# EAGLE board h_bridge_v2.1 (EAGLE 7.1.0)
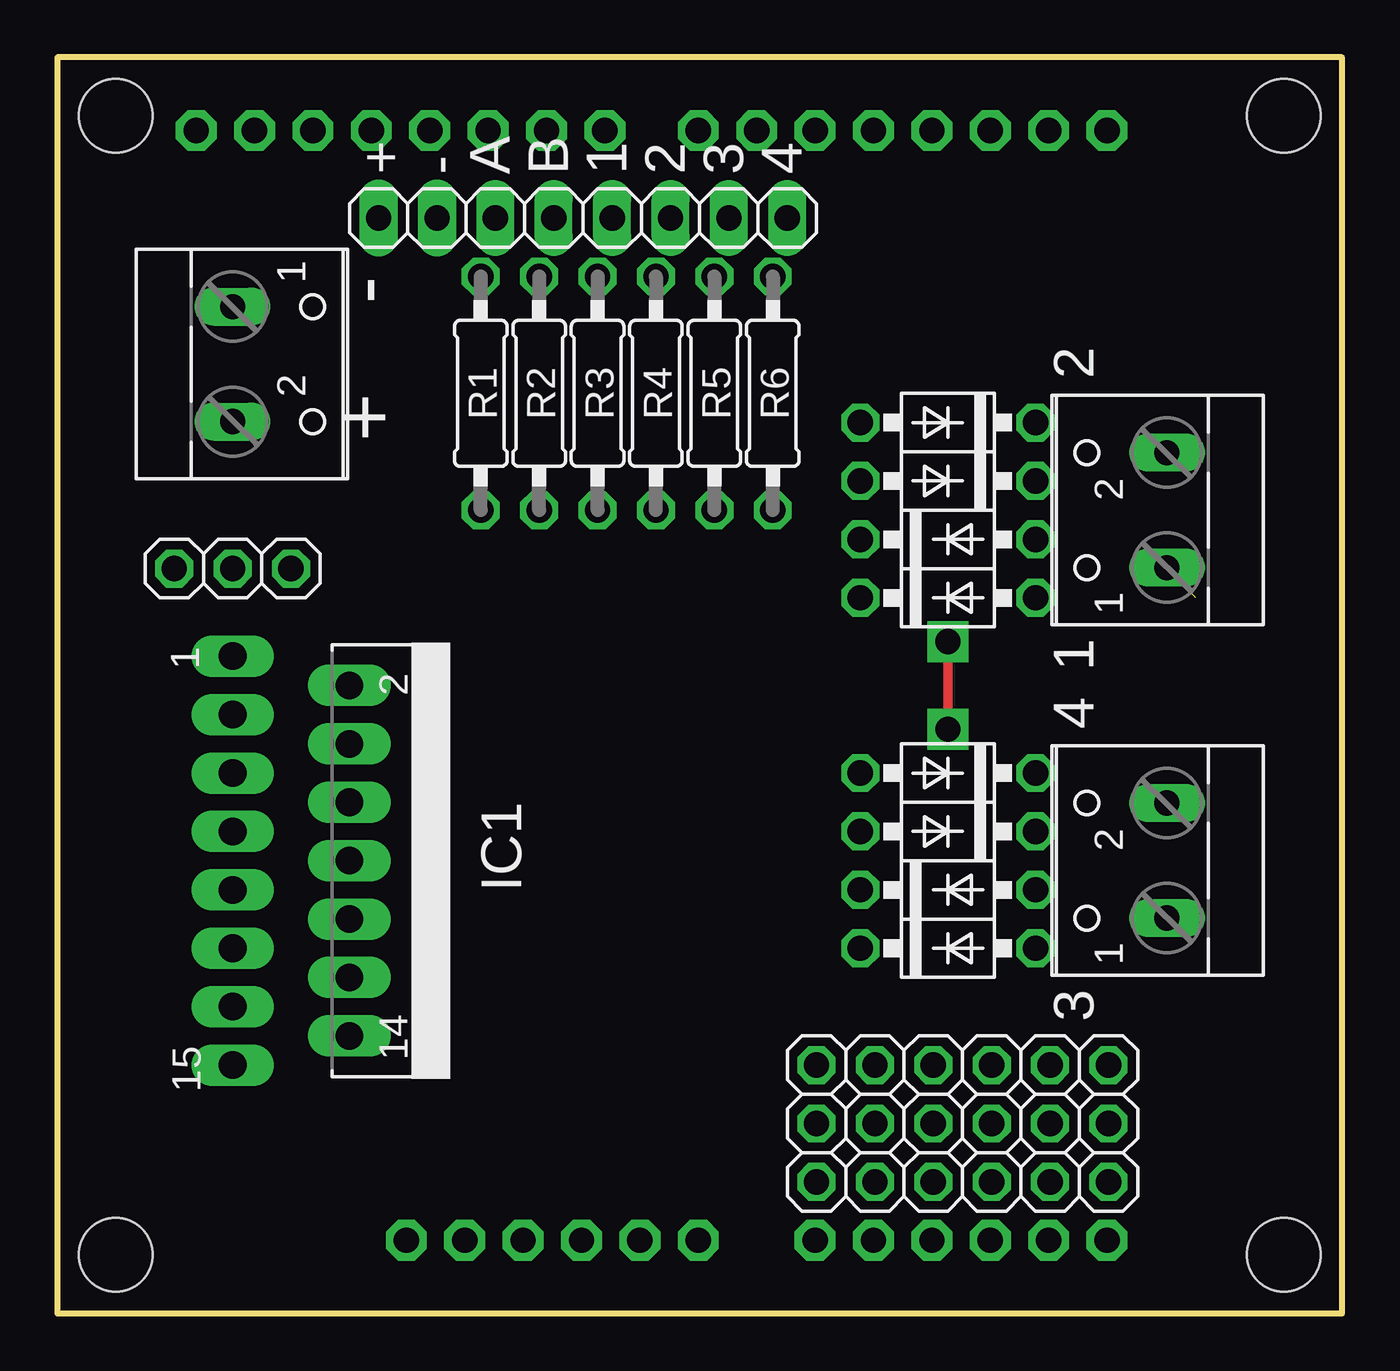
[diagram p0: board, top side]
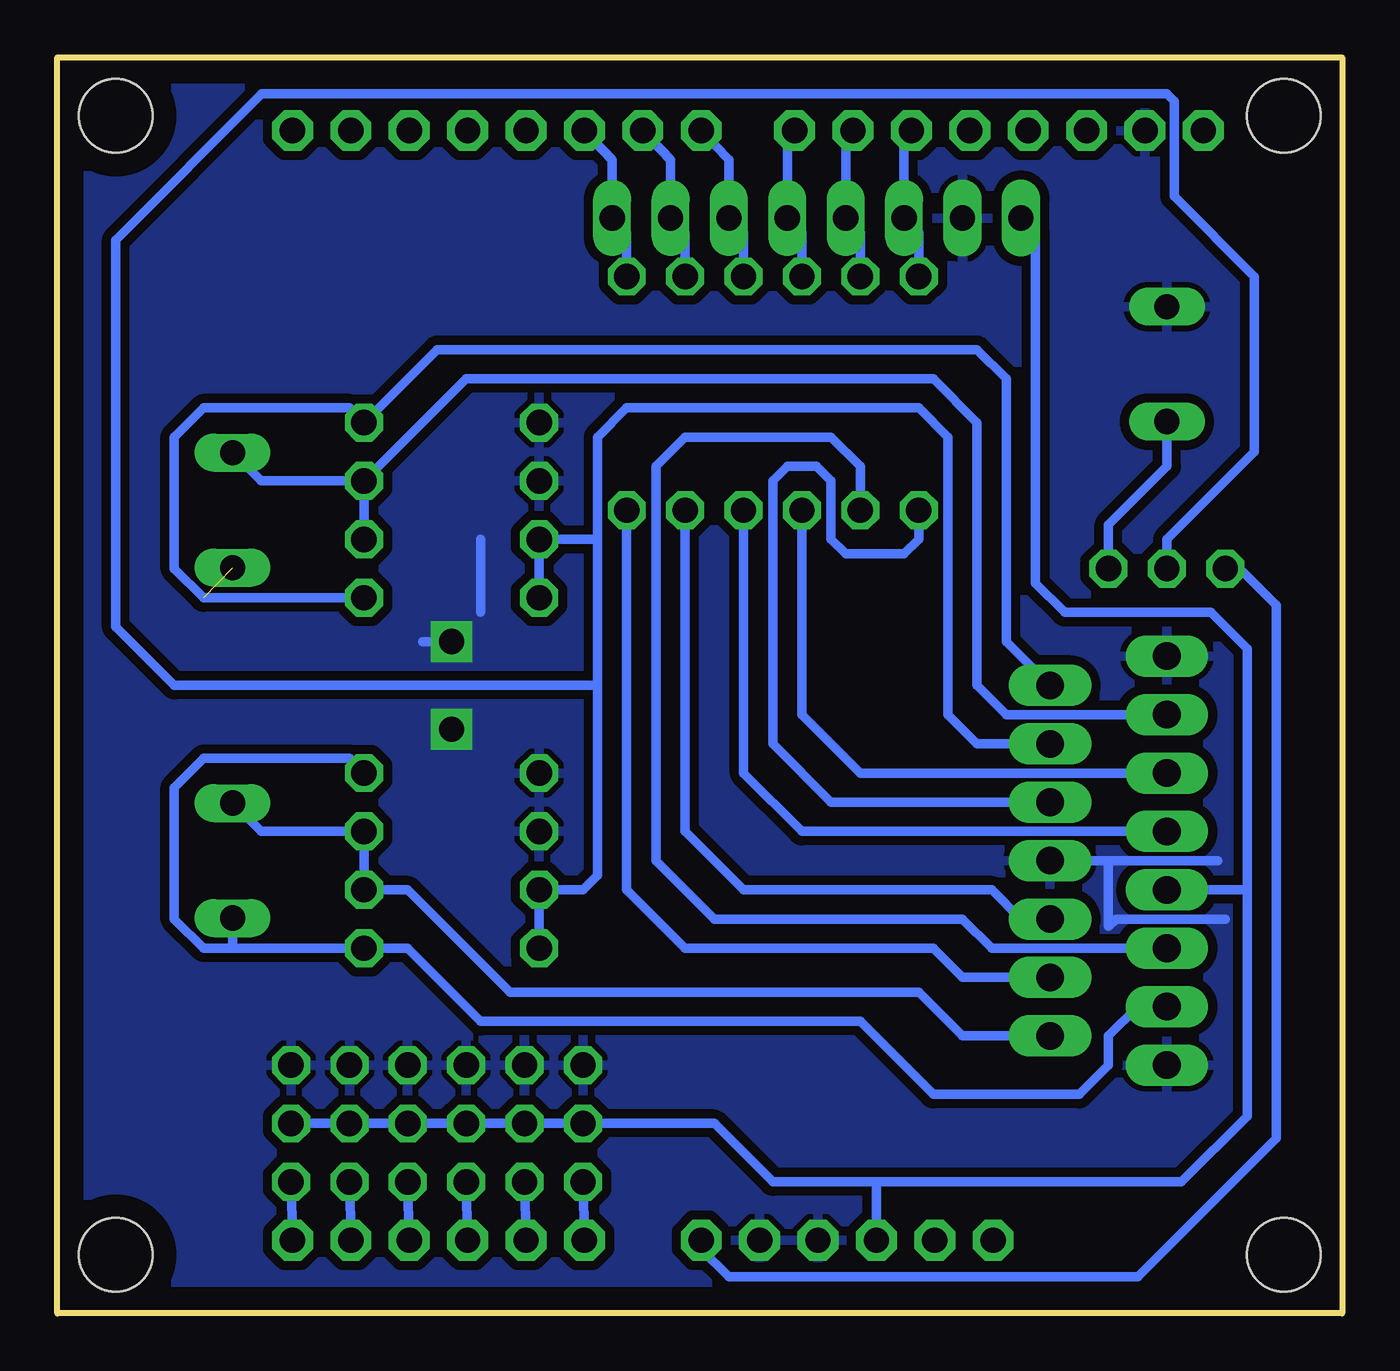
[diagram p1: board, bottom side, seen from below]

Size 55.88 x 54.61 mm. Coordinates in mm from the lower left corner, seen from the top.
Outline: 0,0 55.88,0 55.88,54.61 0,54.61 0,0
Copper layers (1*16): Top 0.035mm / dielectric 1.5mm / Bottom 0.035mm
Design rules "default": minimum track width 10mil, minimum drill 24mil, track to track 8mil, track to pad 8mil, pad to pad 8mil, via to via 8mil, smd to smd 8mil, copper to edge 40mil, drill to drill 8mil, minimum pad ring 10mil, minimum via ring 8mil, stop-mask expansion 4mil, vias tented up to drill 0mil, thermal gap 10mil
Holes 3.2 mm at 2.54,2.54 53.34,2.54 53.34,52.07 2.54,52.07

## Footprints (pad centres in the part's own frame; a part is rotated, then mirrored left to right if it is on the bottom)
DO41-10 = drill 1.1 octagon: A 3.81,0; C -3.81,0
MULTIWATT-15 = drill 1.2 long: 1 -8.89,-7.62; 2 -7.62,-2.54; 3 -6.35,-7.62; 4 -5.08,-2.54; 5 -3.81,-7.62; 6 -2.54,-2.54; 7 -1.27,-7.62; 8 0,-2.54; 9 1.27,-7.62; 10 2.54,-2.54; 11 3.81,-7.62; 12 5.08,-2.54; 13 6.35,-7.62; 14 7.62,-2.54; 15 8.89,-7.62
1X06 = drill 1.1 long: 1 -6.35,0; 2 -3.81,0; 3 -1.27,0; 4 1.27,0; 5 3.81,0; 6 6.35,0
1X03 = drill 1.1 octagon: 1 -2.54,0; 2 0,0; 3 2.54,0
1X02 = drill 1.1 pad 1.676 long: 1 -1.27,0; 2 1.27,0
0207/10 = drill 1.1 octagon: 1 -5.08,0; 2 5.08,0
ARDUINO-HOLE = drill 1.1 pad 1.778 octagon: 3V 19.05,3.81; 5V 21.59,3.81; A0 34.29,3.81; A1 36.83,3.81; A2 39.37,3.81; A3 41.91,3.81; A4 44.45,3.81; A5 46.99,3.81; AREF 7.366,52.07; D0 46.99,52.07; D1 44.45,52.07; D2 41.91,52.07; D3 39.37,52.07; D4 36.83,52.07; D5 34.29,52.07; D6 31.75,52.07; D7 29.21,52.07; D8 25.146,52.07; D9 22.606,52.07; D10 20.066,52.07; D11 17.526,52.07; D12 14.986,52.07; D13 12.446,52.07; GND 9.906,52.07; GND1 26.67,3.81; GND2 24.13,3.81; RESET 16.51,3.81; VIN 29.21,3.81
W237-102 = drill 1.1 long: 1 -2.5,-1.27; 2 2.5,-1.27

## Placement (x,y rotation side)
D1  1N4004A  [DO41-10]  38.74,33.66 0 top
D2  1N4004A  [DO41-10]  38.74,31.11 0 top
D3  1N4004A  [DO41-10]  38.74,36.2 180 top
D4  1N4004A  [DO41-10]  38.74,38.73 180 top
D5  1N4004A  [DO41-10]  38.74,18.41 0 top
D6  1N4004A  [DO41-10]  38.74,15.88 0 top
D7  1N4004A  [DO41-10]  38.74,20.95 180 top
D8  1N4004A  [DO41-10]  38.74,23.49 180 top
IC1  L298  [MULTIWATT-15]  15.24,19.68 270 top
JP1  [1X06]  25.4,47.62 0 top
JP2  [1X03]  7.62,32.39 0 top
JP3  [1X03]  33.02,8.26 90 top
JP4  [1X03]  35.56,8.26 90 top
JP5  [1X03]  38.1,8.26 90 top
JP6  [1X03]  40.64,8.26 90 top
JP7  [1X03]  43.18,8.26 90 top
JP8  [1X03]  45.72,8.26 90 top
JP9  [1X02]  15.24,47.62 0 top
R1  [0207/10]  18.41,40.01 270 top
R2  [0207/10]  20.95,40.01 270 top
R3  [0207/10]  23.5,40.01 270 top
R4  [0207/10]  26.04,40.01 270 top
R5  [0207/10]  28.57,40.01 270 top
R6  [0207/10]  31.11,40.01 270 top
U$1  ARDUINO-HOLE  [ARDUINO-HOLE]  -1.33,-0.64 0 top
X1  [W237-102]  46.99,34.93 90 top
X2  [W237-102]  46.99,19.68 90 top
X3  [W237-102]  8.89,41.27 270 top

## Library data of the parts
D1-D8 JP1-JP9 R1-R6 U$1 X1-X3 = h_bridge_v2
IC1 = h_bridge_v2; MPN: L298N; OC_FARNELL: 1589425; OC_NEWARK: 32M1527

## Nets
3V: U$1.3V
+5V: IC1.9 JP3.2 JP4.2 JP5.2 JP6.2 JP7.2 JP8.2 JP9.1 U$1.5V
+12V: D1.C D2.C D5.C D6.C IC1.4 JP2.2
GND: D3.A D4.A D7.A D8.A IC1.1 IC1.8 IC1.15 JP3.3 JP4.3 JP5.3 JP6.3 JP7.3 JP8.3 JP9.2 U$1.GND U$1.GND1 U$1.GND2 X3.1
IN_A1: JP1.3 R3.1 U$1.D8
IN_A2: JP1.4 R4.1 U$1.D7
IN_B1: JP1.5 R5.1 U$1.D6
IN_B2: JP1.6 R6.1 U$1.D5
N$1: IC1.6 R1.2
N$2: IC1.11 R2.2
N$3: IC1.5 R3.2
N$4: IC1.7 R4.2
N$5: IC1.10 R5.2
N$6: IC1.12 R6.2
N$16: JP3.1 U$1.A0
N$17: JP4.1 U$1.A1
N$18: JP5.1 U$1.A2
N$19: JP6.1 U$1.A3
N$20: JP7.1 U$1.A4
N$21: JP8.1 U$1.A5
OUT1: D2.A D4.C IC1.2 X1.1
OUT2: D1.A D3.C IC1.3 X1.2
OUT3: D6.A D8.C IC1.13 X2.1
OUT4: D5.A D7.C IC1.14 X2.2
PWM_A: JP1.1 R1.1 U$1.D10
PWM_B: JP1.2 R2.1 U$1.D9
PWR: JP2.3 X3.2
VIN: JP2.1 U$1.VIN

## Tracks (layer width: path | path; a pad name or v marks a point on that pad's centre or on a via)
+5V
  Bottom 0.406: 20.32,5.71 6.98,5.71 4.13,8.57 4.13,18.41 | 20.32,5.71 24.77,5.71 27.3,8.26 JP3.2 JP4.2 JP5.2 JP6.2 JP7.2 JP8.2 | 4.13,18.41 IC1.9 | JP9.1 13.33,46.99 13.33,31.75 12.06,30.48 5.71,30.48 4.13,28.89 4.13,18.41 | U$1.5V 20.26,5.65 20.32,5.71
+12V
  Bottom 0.406: 32.38,27.3 50.8,27.3 53.34,29.84 53.34,46.67 46.99,53.02 7.62,53.02 7.3,52.71 7.3,48.58 3.81,45.09 3.81,37.47 7.62,33.66 JP2.2 | IC1.4 15.88,24.76 17.14,26.04 17.14,38.1 18.41,39.37 31.11,39.37 32.38,38.1 32.38,33.66 | D6.C D5.C 33.02,18.41 32.38,19.05 32.38,27.3 | 32.38,33.66 32.38,27.3 | D2.C D1.C 32.38,33.66
GND  (via drill 1.1 pad 1.78)
  Top 0.406: v38.74,25.4 v38.74,29.21
  Bottom 0.406: IC1.8 10.16,19.68 | 5.4,19.68 10.16,19.68 | 10.16,19.68 10.16,16.83 9.84,17.14 5.08,17.14 | v38.74,29.21 40.01,29.21 | 37.47,30.48 37.47,33.66
  pour Bottom (isolate 0.406): -0.64,55.88 -0.64,-1.27 56.52,-0.95 56.52,56.2
IN_A1
  Bottom 0.406: U$1.D8 24.13,51.18 JP1.3 23.5,46.99 R3.1
IN_A2
  Bottom 0.406: U$1.D7 26.67,50.16 JP1.4 26.04,46.99 R4.1
IN_B1
  Bottom 0.406: U$1.D6 29.21,50.16 JP1.5 28.57,46.99 R5.1
IN_B2
  Bottom 0.406: U$1.D5 31.75,50.16 JP1.6 31.11,46.99 R6.1
N$1
  Bottom 0.406: IC1.6 22.22,22.22 24.77,24.76 24.77,36.2 24.13,36.83 22.86,36.83 22.22,36.2 22.22,33.66 21.59,33.02 19.05,33.02 18.41,33.66 R1.2
N$2
  Bottom 0.406: R2.2 20.95,36.83 22.22,38.1 28.57,38.1 29.84,36.83 29.84,19.68 27.3,17.14 16.51,17.14 15.24,15.88 IC1.11
N$3
  Bottom 0.406: IC1.5 20.95,23.49 23.5,26.04 R3.2
N$4
  Bottom 0.406: R4.2 26.04,23.49 23.5,20.95 IC1.7
N$5
  Bottom 0.406: R5.2 28.57,20.95 26.04,18.41 15.24,18.41 13.97,17.14 IC1.10
N$6
  Bottom 0.406: R6.2 31.11,18.41 28.57,15.88 17.78,15.88 16.51,14.61 IC1.12
N$16
  Bottom 0.406: U$1.A0 JP3.1
N$17
  Bottom 0.406: U$1.A1 JP4.1
N$18
  Bottom 0.406: U$1.A2 JP5.1
N$19
  Bottom 0.406: U$1.A3 JP6.1
N$20
  Bottom 0.406: U$1.A4 JP7.1
N$21
  Bottom 0.406: U$1.A5 JP8.1
OUT1  (1 unrouted)
  Bottom 0.406: IC1.2 14.61,29.21 14.61,40.64 15.88,41.91 39.37,41.91 D4.C 43.18,39.37 49.53,39.37 50.8,38.1 50.8,32.39 49.53,31.11 D2.A
OUT2
  Bottom 0.406: IC1.3 14.61,26.04 15.88,27.3 15.88,38.73 17.78,40.64 38.1,40.64 D3.C | D3.C D1.A | X1.2 47.03,36.2 D3.C
OUT3
  Bottom 0.406: IC1.13 8.89,13.34 10.16,12.06 10.16,10.79 11.43,9.53 17.78,9.53 20.95,12.7 37.47,12.7 40.64,15.88 D6.A 48.26,15.88 | 48.26,15.88 49.53,15.88 50.8,17.14 50.8,22.86 49.53,24.13 43.18,24.13 D8.C | 48.26,15.88 X2.1
OUT4
  Bottom 0.406: IC1.14 16.51,12.06 18.41,13.97 36.2,13.97 40.64,18.41 D5.A D7.C 47.03,20.95 X2.2
PWM_A
  Bottom 0.406: U$1.D10 19.05,51.18 JP1.1 18.41,46.99 R1.1
PWM_B
  Bottom 0.406: U$1.D9 21.59,51.18 JP1.2 20.95,46.99 R2.1
PWR
  Bottom 0.406: JP2.3 10.16,34.29 7.62,36.83 X3.2
VIN
  Bottom 0.406: JP2.1 4.45,32.39 2.86,30.8 2.86,7.62 8.89,1.59 26.67,1.59 27.88,2.79 U$1.VIN

## Text on the board
tNames: + | - | A | B | 1 | 2 | 3 | 4 | - | + | 2 | 1 | 4 | 3
tValues: PWR | A | Vin | Pwr | B